# Altium PCB fat32 (2).PcbDoc
Units mm, origin at the board's own origin, x right, y up, seen from the top; angles counter-clockwise.
Board outline 354.7 x 156.7 mm, 2 copper layers (Top Layer, Bottom Layer); 46 components, 482 nets, 145 pads, 64 vias.
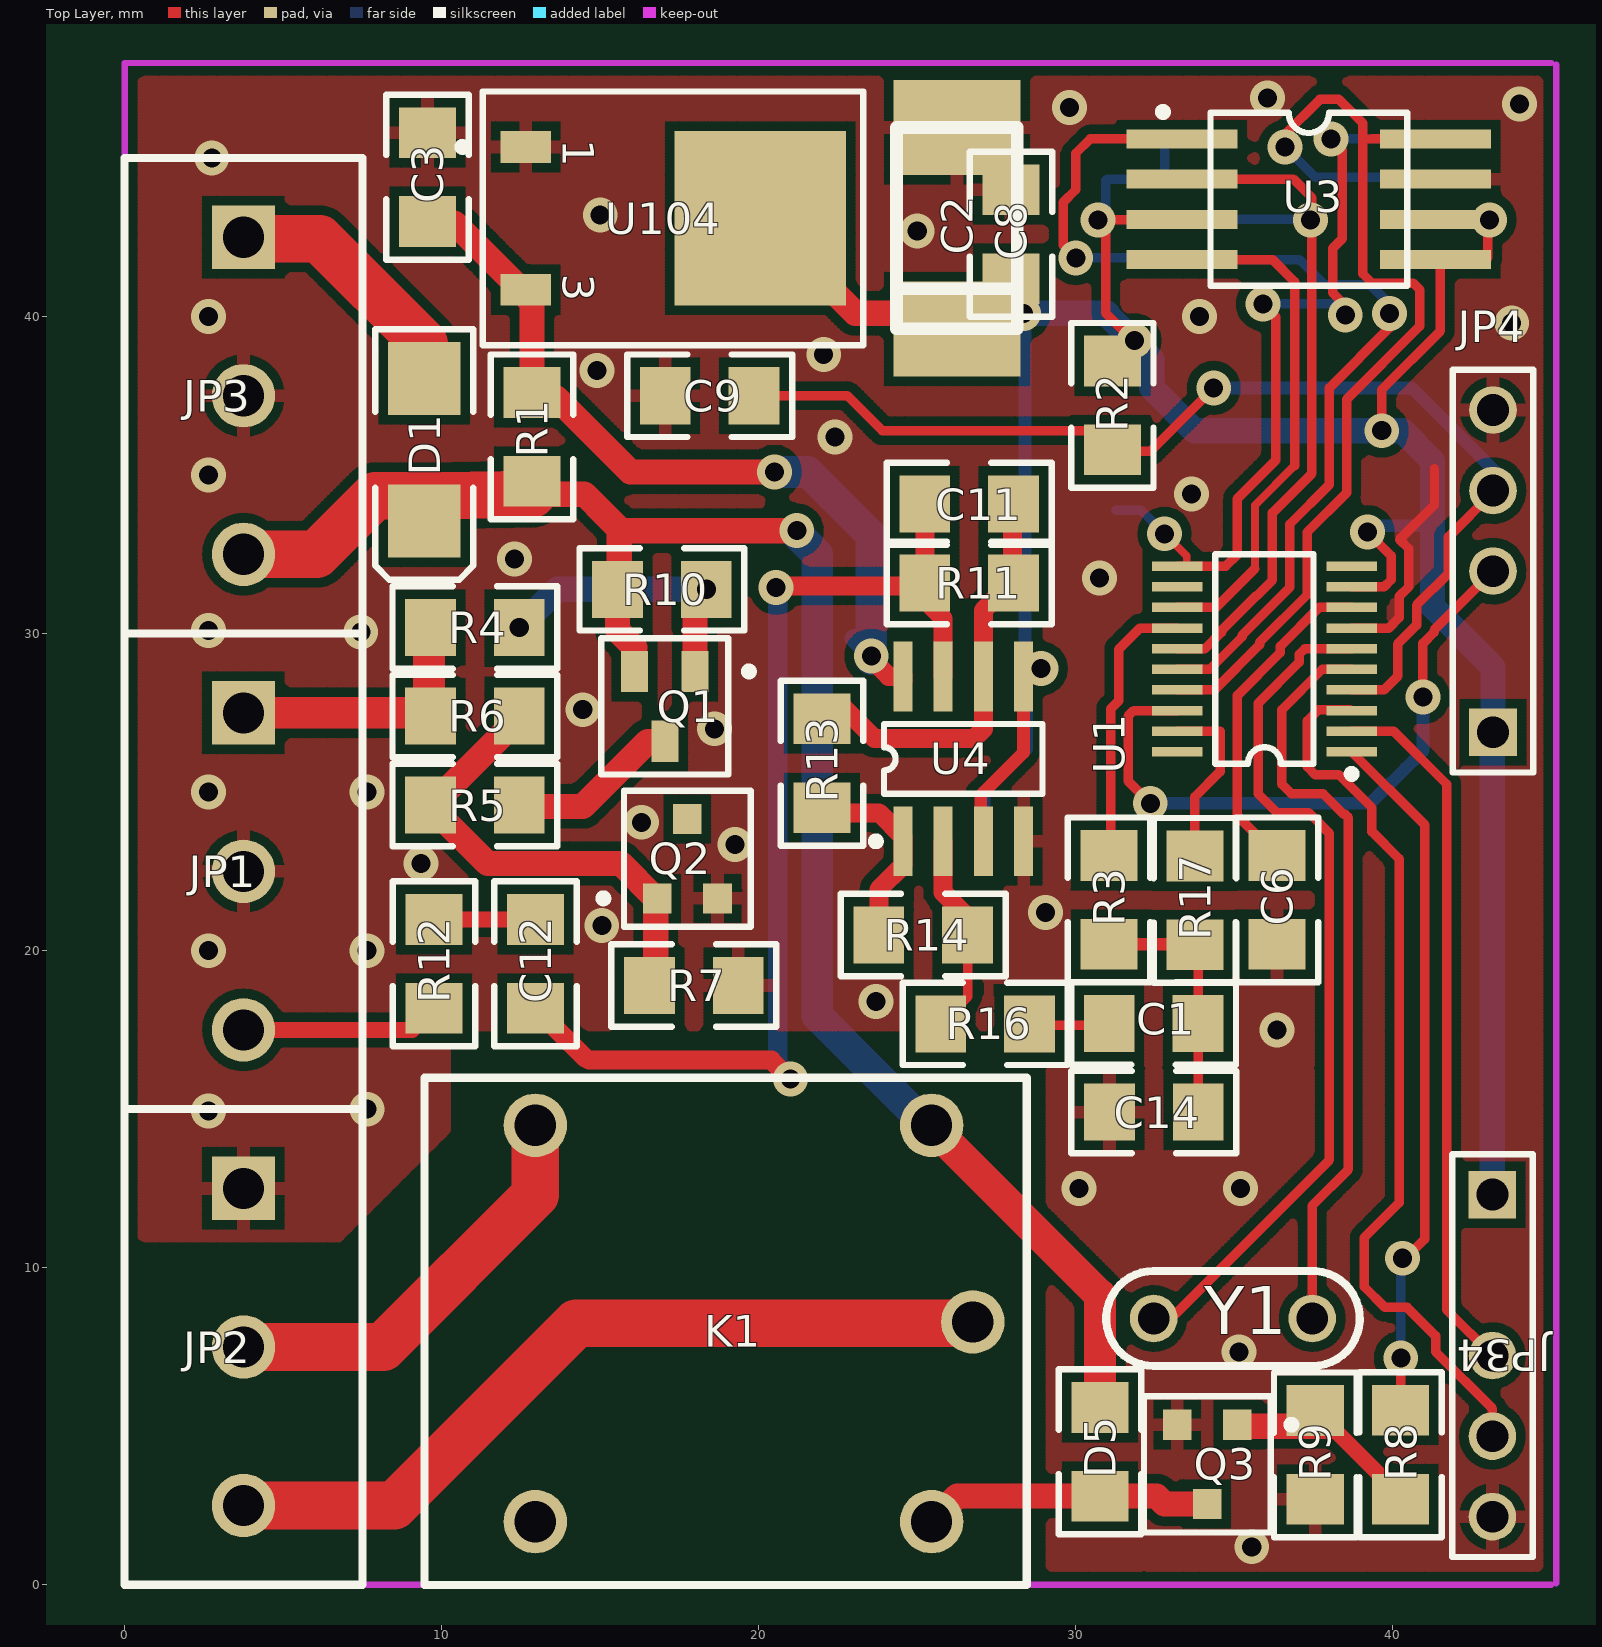
[diagram p0: Top Layer view]
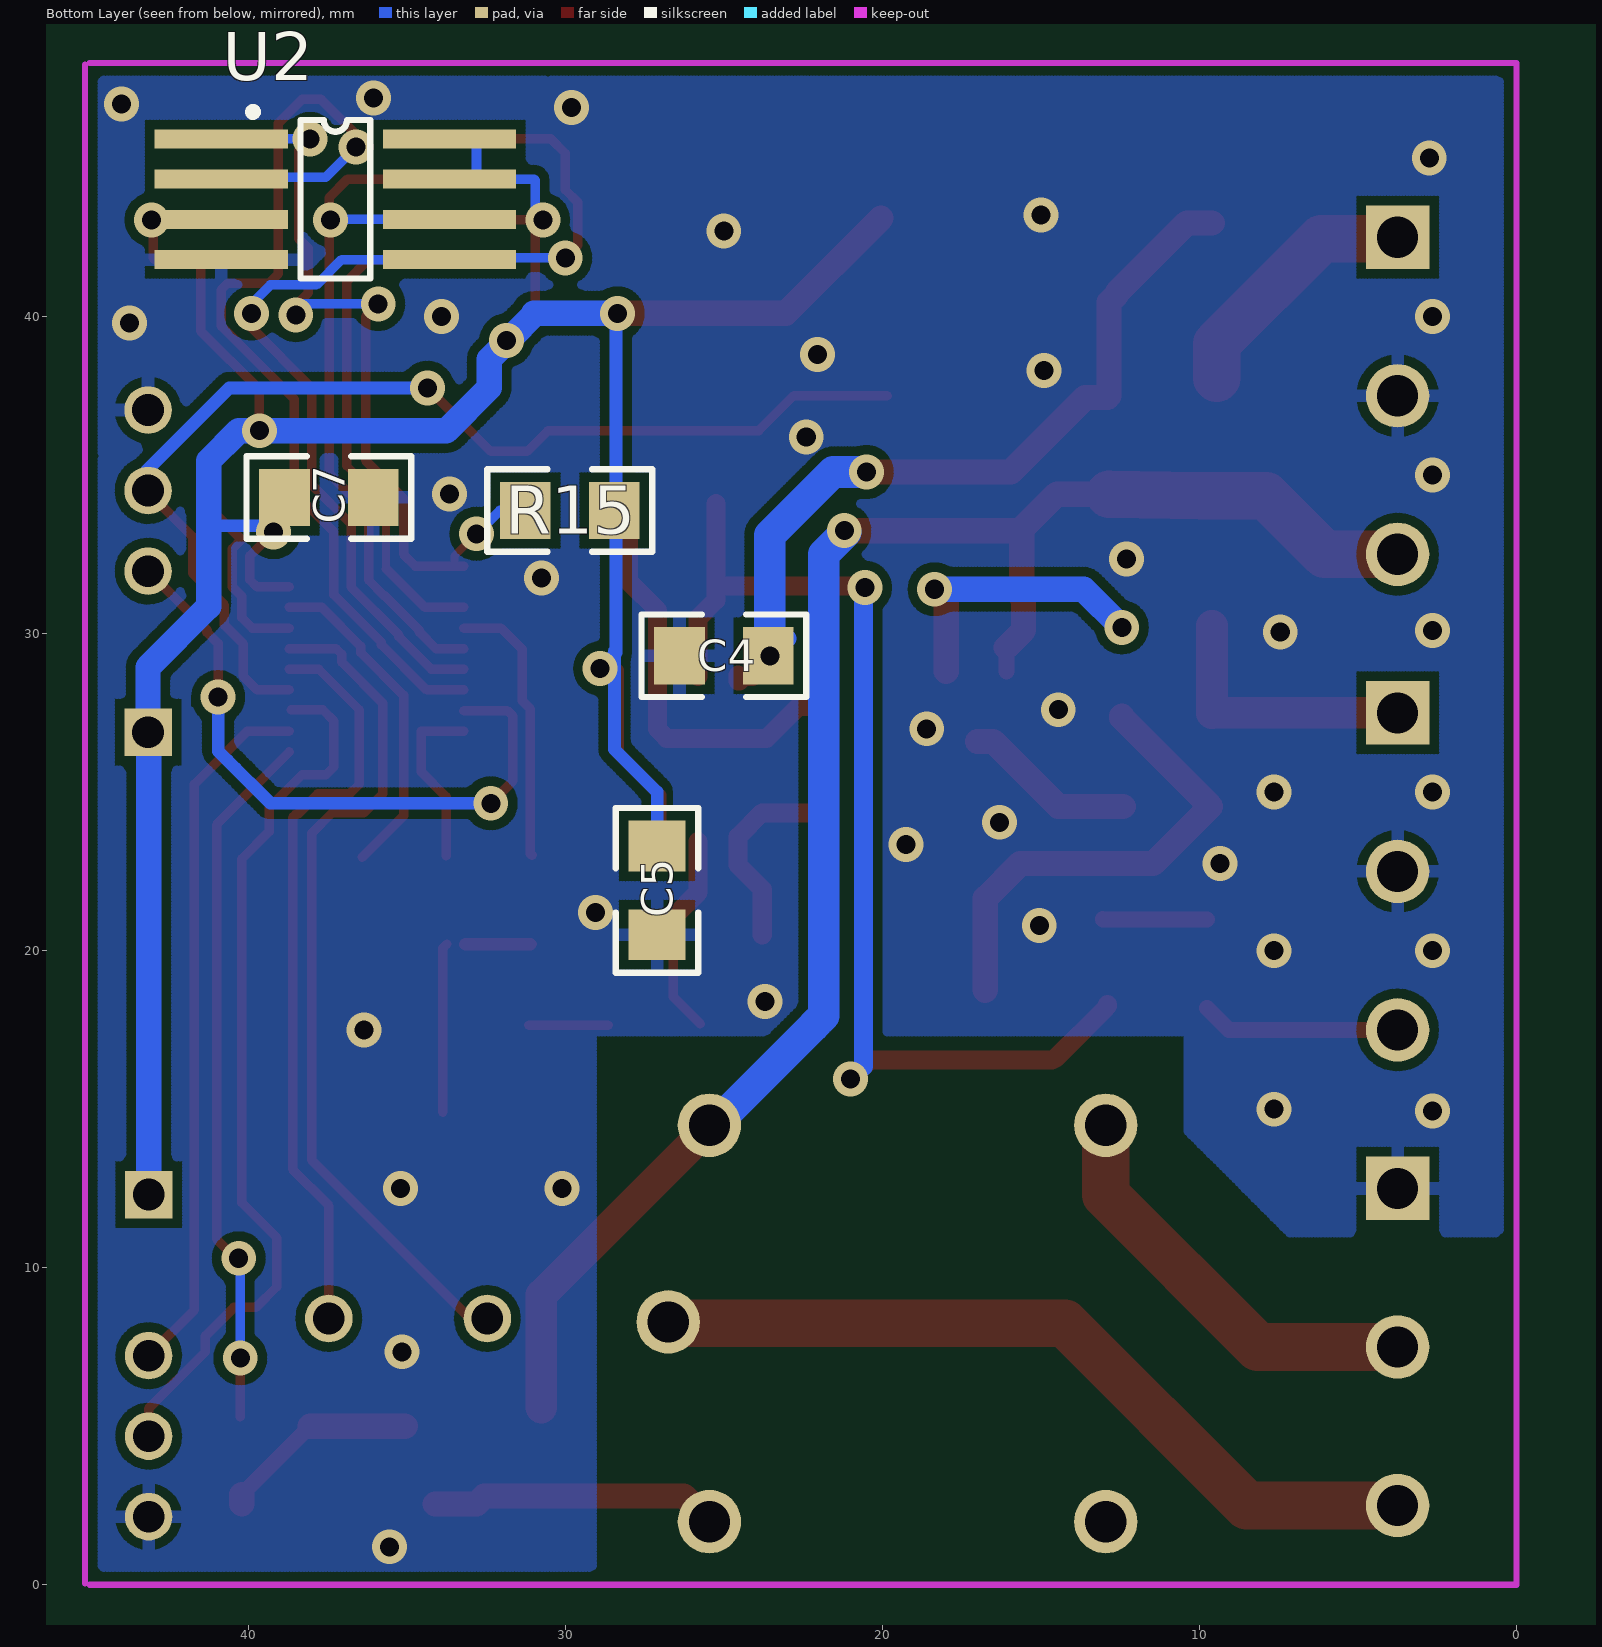
[diagram p1: Bottom Layer view, seen from below]

## Layer stack, top to bottom
Top Layer: signal copper 0.0356
Dielectric: dielectric 0.32, FR-4, Dk 4.8
Bottom Layer: signal copper 0.0356

## Board outline
-33.3,143.2 -33.3,-13.5 320.7,-13.5 320.7,139.05 -33.65,139.05 -33.65,-13.5 -34,-13.5

## Design rules (kind name [scope] priority, off if disabled: settings)
Clearance Keep_Out [OnLayer('Keep-Out Layer')] p1: gap=0.3
Clearance Poly [InPoly] p2: gap=0.3
Clearance [All] p3: gap=0.25
ComponentClearance [All] p1: gap=0.254 collisioncheckmode=0
HoleSize [All] p1: absolutevalues=TRUE maxlimit=5 minlimit=0.025 maxpercent=80.000 minpercent=20.000
PolygonConnect [All] p1: connectstyle=Relief reliefconductorwidth=0.4 reliefentries=4 polygonreliefangle="90 Angle"
RoutingLayers [All] p1: top layer=Horizontal bottom layer=Vertical
RoutingVias [All] p1: holewidth=0.6 width=1.1 viastyle="Through Hole" minholewidth=0.6 minwidth=1.1 maxholewidth=0.7 maxwidth=1.2
SolderMaskExpansion [All] p1: expansion=0.102
TestPointUsage [All] p1: valid=0 allowmultiple=FALSE
Testpoint [All] p1: side=15 testpointundercomponent=TRUE minsize=1.016 maxsize=2.54 preferedsize=1.524 minholesize=0 maxholesize=1.016 preferedholesize=0.813 testpointgrid=0.025 style=1023 order=1234567890
Width [All] p1: maxlimit=2 minlimit=0.2 preferedwidth=0.254 toplayer_prefwidth=0.25 bottomlayer_prefwidth=0.3 minimp=50.000000 maximp=50.000000 favimp=50.000000
15 further rules are at their usual default settings.

## Components (designator, comment, footprint, x,y, rotation, side; value= is the part's Value field where it differs from the comment)
C1 "1.0" _1206#1 32.45,17.7 r0 top
C2 "22.0x50" CAP_EL_6_3 26.25,39.6 r90 top
C3 "1.0" _1206#1 9.55,44.4 r270 top
C4 "1.0" _1206#1 25,29.3 r180 bottom
C5 "1.0" _1206#1 27.1,21.9 r90 bottom
C6 "1.0" _1206#1 36.35,21.6 r90 top
C7 "1.0" _1206#1 37.45,34.3 r0 bottom
C8 "1.0" _1206#1 27.95,42.6 r270 top
C9 "1.0" _1206#1 18.45,37.5 r0 top
C11 "1n0" _1206#2 26.65,34.1 r0 top
C12 "1.0" _1206#2 12.95,19.6 r90 top
C14 "0.1" _1206#2 32.45,14.9 r180 top
D1 "10BQ100" DSO-C2/X2.3 9.45,35.8 r270 top
D5 "BAV103" _1206d 30.75,4.2 r270 top
JP1 "Header 3" BT5-3 3.75,27.5 r270 top
JP2 "Header 3" BT5-3 3.75,12.5 r270 top
JP3 "Header 3" BT5-3 3.75,42.5 r270 top
JP4 "SWIM_CONN" HDR1X5_uart 43.15,26.9 r90 top
JP34 "UART_PORT" HDR1X5_uart 43.15,12.3 r270 top
K1 "BS115" BS115 25.45,2 r90 top
Q1 "BC856" SO-G3 17.05,27.7 r180 top
Q2 "BC847" SO-G3/C2.5 17.75,22.9 r0 top
Q3 "BC847" SO-G3/C2.5 34.15,3.8 r180 top
R1 "Res2" _1206#1 12.85,36.2 r90 top
R2 "1K0" _1206#1 31.15,37.2 r270 top
R3 "1K0" _1206#1 31.05,21.6 r90 top
R4 "1K0" _1206#1 11.05,30.2 r180 top
R5 "1K0" _1206#1 11.05,24.6 r180 top
R6 "1K0" _1206#1 11.05,27.4 r180 top
R7 "10K" _1206#1 17.95,18.9 r0 top
R8 "3K0" _1206#1 40.25,4.1 r90 top
R9 "10K" _1206#1 37.55,4.1 r270 top
R10 "10K" _1206#1 16.95,31.4 r180 top
R11 "33K" _1206#2 26.65,31.6 r0 top
R12 "1K0" _1206#2 9.75,19.6 r90 top
R13 "10K" _1206#2 22,25.9 r270 top
R14 "1K0" _1206#2 25.2,20.5 r0 top
R15 "1K0" _1206#3 29.85,33.9 r180 bottom
R16 "10K" _1206#2 27.15,17.7 r0 top
R17 "1K0" _1206#2 33.75,21.6 r90 top
U1 "STM8S103F" TSSO6x6-G20/Y1.6 35.95,29.2 r90 top (schematic designator U?)
U2 "M25P10" SO-G8#1 37.25,43.7 r270 bottom
U3 "AT45DB161D-SU" AT45W 37.35,43.7 r270 top
U4 "LM358M" SO-G8#2 26.45,26.05 r0 top
U104 "REG1117-3.3" SIP-G3/C7.4 16.35,43.1 r270 top
Y1 "10MGz" QWARZ1 32.45,8.4 r0 top

## Footprints (in the part's own frame and the unit in brackets; to place one, negate y for a bottom-side part, rotate by r counter-clockwise, add the part's x,y. Pads: shape width x height; smd on the part's side, far side on the other; paste and mask are expansions set on the pad)
_1206#1 [mm]
  rect 1.6x1.8 smd: 1(-1.397,0.003) 2(1.403,0.003)
  silkscreen extent -2.6,-1.3 2.6,1.3
_1206#2 [mm]
  rect 1.6x1.8 smd: 1(-1.412,-0.007) 2(1.388,-0.007)
  silkscreen extent -2.61,-1.31 2.59,1.29
_1206#3 [mm]
  rect 1.6x1.8 smd: 1(-1.409,-0.014) 2(1.391,-0.014)
  silkscreen extent -2.61,-1.31 2.59,1.29
_1206d [mm]
  rect 1.6x1.8 smd: 1(1.405,0.012) 2(-1.395,0.012)
  silkscreen extent -2.6,-1.29 2.6,1.31
AT45W [mm]
  rect 0.6x3.5 smd: 1(-1.905,-4) 2(-0.635,-4) 3(0.635,-4) 4(1.905,-4) 5(1.905,4) 6(0.635,4) 7(-0.635,4) 8(-1.905,4)
  silkscreen extent -2.88,-4.72 2.73,3.1
BS115 [mm]
  round 2 hole 1.3: 1(6.292,-1.304) 2(-0.008,12.496) 3(12.492,12.496) 4(-0.008,-0.004) 5(12.492,-0.004)
  silkscreen extent -2.01,-3 13.99,16
BT5-3 [mm]
  round 2 on Top Overlay: 0(-0.001,-4.001)
  rect 2x2 hole 1.3: 1(-0.001,-0.001)
  round 2 hole 1.3: 2(4.999,-0.001) 3(9.999,-0.001)
  silkscreen extent -2.5,-3.75 12.5,3.75
CAP_EL_6_3 [mm]
  rect 3x4 smd: 1(0.011,-0.002) 2(6.361,-0.002)
  silkscreen extent 0.01,-1.91 6.36,1.9
DSO-C2/X2.3 [mm]
  rect 2.3x2.3 smd: 1(-2.25,0) 2(2.25,0)
  silkscreen extent -3.8,-1.55 4.1,1.55
HDR1X5_uart [mm]
  rect 1.5x1.5 hole 1: 1(-0.008,-0.009)
  round 1.5 hole 1: 3(5.072,-0.009) 4(7.612,-0.009) 5(10.152,-0.009)
  silkscreen extent -1.28,-1.28 11.42,1.26
QWARZ1 [mm]
  round 1.5 hole 1: 1(0.008,0) 2(5.008,0)
  silkscreen extent -1.49,-1.5 6.51,1.5
SIP-G3/C7.4 [mm]
  rect 1x1.6 smd: 1(-2.25,-3.7) 3(2.25,-3.7)
  rect 5.5x5.4 smd: 4(0,3.7)
  silkscreen extent -4,-5.82 4,6.95
SO-G3 [mm]
  rect 0.85x1.3 smd: 1(-0.938,-1.106) 2(0.962,-1.106) 3(0.012,1.094)
  silkscreen extent -2.76,-2.16 2.01,2.14
SO-G3/C2.5 [mm]
  rect 0.9x0.95 smd: 1(-0.95,-1.25) 2(0.95,-1.25) 3(0,1.25)
  silkscreen extent -2.77,-2.15 2,2.15
SO-G8#1 [mm]
  rect 0.6x4.2 smd: 1(-1.905,-3.6) 2(-0.635,-3.6) 3(0.635,-3.6) 4(1.905,-3.6) 5(1.905,3.6) 6(0.635,3.6) 7(-0.635,3.6) 8(-1.905,3.6)
  silkscreen extent -2.88,-2.72 2.5,1.1
SO-G8#2 [mm]
  rect 0.6x2.2 smd: 1(-1.905,-2.6) 2(-0.635,-2.6) 3(0.635,-2.6) 4(1.905,-2.6) 5(1.905,2.6) 6(0.635,2.6) 7(-0.635,2.6) 8(-1.905,2.6)
  silkscreen extent -2.88,-2.72 2.5,1.1
TSSO6x6-G20/Y1.6 [mm]
  rect 0.3x1.6 smd: 1(-2.925,-2.75) 2(-2.275,-2.75) 3(-1.625,-2.75) 4(-0.975,-2.75) 5(-0.325,-2.75) 6(0.325,-2.75) 7(0.975,-2.75) 8(1.625,-2.75) 9(2.275,-2.75) 10(2.925,-2.75) 11(2.925,2.75) 12(2.275,2.75) 13(1.625,2.75) 14(0.975,2.75) 15(0.325,2.75) 16(-0.325,2.75) 17(-0.975,2.75) 18(-1.625,2.75) 19(-2.275,2.75) 20(-2.925,2.75)
  silkscreen extent -3.75,-2.87 3.3,1.55

## Part data
C1 C3 C4 C5 C6 C7 C8 C9 C11 C12 C14: library part "Cap Semi", "Capacitor (Semiconductor SIM Model)"
C2: library part "Cap Pol1", "Polarized Capacitor (Radial)"
D1 D5: library part 10BQ015, "Schottky Rectifier"
JP1 JP2 JP3: "Header, 3-Pin"
JP34: "Header, 5-Pin"
K1: "Single-Pole Dual-Throw Relay"
Q1: library part GT109
Q2 Q3: library part BC847ALT1, "General Purpose Transistor NPN Silicon"
R1: "Resistor"
R2 R3 R4 R5 R6 R7 R8 R9 R11 R12 R13 R14 R15 R16 R17: library part Res2, "Resistor"
R10: library part RES, "Resistor"
U4: "Low-Power Dual Operational Amplifier"
U104: "800mA and 1A Low Dropout Positive Regulator 2.85V, 3.3V, 5V, and Adjustable"
Y1: library part XTAL, "Crystal Oscillator"

## Via types
v1: diameter 1.1, hole 0.6, Top Layer to Bottom Layer, 64 vias

## Nets (pads, with @x,y where several pads share a name; then routed paths per layer and width w, separated by ;. In a path a pad name is that pad's centre, name@x,y a point inside that pad or via, vN(x,y) a via of type N, cw(c..) or ccw(c..) an arc to the next point about the centre after c; other vN are vias at no path point)
+3.3V: 
+3V3: C2.1 C5.2 C7.2 C8.2 JP4.1 JP34.1 R2.1 R15.2 U1.9 U2.3 U2.7 U2.8 U3.3 U3.5 U3.6 U4.3 U4.5 U104.4 | length 106.9
  Top Layer w0.3: v1@30.95,43 v1@30.95,42.95 ; v1@31,43 v1@30.95,42.95 ; v1@31,43.05 U3.3@33.3,43.05 ; v1(31.85,39.25) 31.8,39.25 30.95,40.1 v1@30.95,42.95 ; U1.9 39.725,31.475 39.95,31.7 39.95,32.45 v1(39.2,33.2) ; v1(39.65,36.4) 39.65,37.7 41.5,39.55 41.5,41.795 U3.5@41.5,41.85 ; U3.5@41.55,41.8 42.95,41.8 43,41.85 U3.6@43,43.05
  Top Layer w0.4: U4.3@27,23.3 27,23.45 27,24.9 28.35,26.25 28.35,28.65 28.35,28.85 28.355,28.85 28.85,28.85 v1(28.9,28.9)
  Top Layer w0.8: U104.4 23.05,40.1 26.252,40.1 27.953,40.1 v1(28.35,40.1)
  Bottom Layer w0.3: v1(30.7,43.05) 30.95,43.3 30.95,44.3 30.985,44.335 U2.7@32.865,44.335 ; U2.7@32.3,44.3 U2.7@33.25,44.3 ; U2.7@34.585,44.315 34.6,44.315 34.615,44.3 34.65,44.335 U2.7 U2.7@32.865,44.335 ; U2.8@34.65,45.605 U2.8 32.855,45.605 32.8,45.55 32.8,44.4 U2.7@32.865,44.335 ; U2.3@39.85,43.065 U2.3 43.035,43.065 v1(43.05,43.05)
  Bottom Layer w0.4: C5.2 27.103,25.003 28.45,26.35 28.45,28.9 28.45,29.35 ; v1(28.35,40.1) 28.376,40.074 28.4,40.05 28.4,33.886 28.4,29.4 28.45,29.35 ; 28.45,29.45 28.45,29.35 ; v1(28.9,28.9) 28.45,29.35 ; v1@31.75,39.3 v1@31.75,39.35 ; v1(39.2,33.2) 39.4,33.4 41.25,33.4
  Bottom Layer w0.8: v1(28.35,40.1) 30.95,40.1 ; 31,40.1 30.95,40.1 ; JP34.1 43.141,26.873 JP4.1 43.159,28.941 41.25,30.85 41.25,33.4 41.25,35.45 40.3,36.4 v1(39.65,36.4) 33.75,36.4 32.4,37.75 32.4,38.65 31.825,39.225 31.75,39.3 30.95,40.1
+3V_: 
+5V: 
+5V: 
+5V_IZ: 
+12V: D1.2 D5.2 JP3.3 K1.5 Q1.2 R1.1 R10.2 | length 56.8
  Top Layer w0.5: R10.2 15.6,31.45 R10.2@15.7,31.55 ; Q1.2 16.088,29.562
  Top Layer w0.8: R1.1@12.85,34.4 14.5,34.4 15.6,33.3 15.6,31.45 15.6,31.397 R10.2@15.6,31.15 ; 14.85,34.05 15.65,33.25 v1(21.2,33.25) ; R10.2 15.547,30.103 16.088,29.562
  Top Layer w1: K1.5@25.45,14.45 30.762,9.138 D5.2
  Top Layer w1.5: JP3.3 6.051,32.501 7.9,34.35 9.45,34.35 9.95,34.35 R1.1@12.85,34.4
  Bottom Layer w1: v1(21.2,33.25) 21.15,33.2 21.85,32.5 21.85,17.95 22.173,17.627 ; 22.05,17.75 25.381,14.419 K1.5@25.4,14.4
+12VI: C3.2 C4.2 R1.2 U4.8 U104.3 | length 26
  Top Layer w0.6: v1(23.55,29.3) 23.55,29.2 24.1,28.65 U4.8 ; U4.8@24.5,28.5 24.545,28.5 24.55,28.5 24.55,28.65 U4.8@24.55,28.7
  Top Layer w0.8: C3.2@9.6,42.95 10.4,42.95 12.575,40.775 12.6,40.75 12.6,40.7 12.85,40.45 12.85,37.603 R1.2@12.85,37.5 ; R1.2@12.9,37.45 13.6,37.45 15.95,35.1 v1(20.5,35.1)
  Bottom Layer w0.6: C4.2@23,29.85 v1(23.55,29.3)
  Bottom Layer w1: v1(20.5,35.1) 21.55,35.1 23.55,33.1 23.55,29.303 v1(23.55,29.3) C4.2@23.55,29.2
+IAKB1: 
+IAKB2: 
+UOUT: 
-5V: 
-5V_IZ: 
-IAKB1: 
-IAKB2: 
-UOUT: 
BAT: 
C0: Q2.3
CAN: 
CS0: U1.13 U3.4 | length 16.4
  Top Layer w0.25: 35.65,32.05 35.65,34.05 36.9,35.3
  Top Layer w0.3: U1.13 34.425,30.825 35.65,32.05 ; U3.4 36.205,41.795 36.9,41.1 36.9,35.3
CS1: R15.1 U1.11 U2.1 | length 24.2
  Top Layer w0.25: v1(32.8,33.15) 33.5,32.45 U1.11@33.5,32.125
  Top Layer w0.3: U1.11 33.5,32.125 34.725,32.125 35.1,32.5 35.1,34.261 36.3,35.461 36.3,36 ; v1(35.9,40.4) 36.3,40 36.3,35.5 ; v1(38.05,45.6) 38.4,45.25 38.4,42.45 38.1,42.15 38.1,40.75 v1@38.45,40.4
  Bottom Layer w0.3: R15.1 32.064,33.886 v1(32.8,33.15) ; v1(35.9,40.4) v1@38.45,40.4 ; v1(38.05,45.6) 38.2,45.6 38.205,45.605 U2.1@39.85,45.605
  other v1: 38.5,40.05
D4: R8.2 U1.1 | length 22.3
  Top Layer w0.3: U1.1 41,23.975 41,10.9 40.4,10.3 v1(40.3,10.3) ; R8.2@40.25,5.3 40.25,5.503 v1(40.25,7.15)
  Bottom Layer w0.3: v1(40.25,7.15) 40.25,10.25 v1(40.3,10.3)
D7: 
D7: 
DT1: 
DT1: 
DT2: 
DT3: 
DT4: 
DT5: 
GND: C2.2 C3.1 C4.1 C5.1 C6.1 C7.1 C8.1 C9.1 C14.2 JP1.2 JP2.1 JP3.2 JP4.5 JP34.5 Q2.2 Q3.2 R7.2 R9.2 U1.7 U2.4 U3.7 U4.4 U104.1 | length 7
  Top Layer w0.3: U1.7 39.875,30.175 40.2,30.5 40.2,31.172 40.5,31.472 40.5,32.678 40.214,32.964 41.3,34.05 41.3,35.193
  other v1: 35.55,1.2 35.15,7.35 30.1,12.5 35.2,12.5 2.65,14.95 7.65,15 36.35,17.5 23.7,18.4 2.65,20 7.65,20 15.05,20.8 29.05,21.2 9.35,22.75 19.25,23.35 16.3,24.05 2.65,25 7.65,25 18.6,27 14.45,27.6 7.45,30.05 2.65,30.1 30.75,31.75 12.3,32.35 33.65,34.4 2.65,35 22.4,36.2 14.9,38.3 22.05,38.8 43.75,39.8 2.65,40 33.9,40 25,42.7 15,43.2 2.75,45 29.8,46.6 44,46.7 36.05,46.9
I1: 
MISO: U1.17 U2.2 U3.8 | length 35.2
  Top Layer w0.3: U1.17 34.375,28.225 35.8,29.65 35.8,29.728 37.3,31.228 37.3,33.2 38.55,34.45 38.55,37.4 40.85,39.7 40.85,40.85 40.65,41.05 39.35,41.05 39.05,41.35 39.05,45.6 ; v1(36.6,45.35) 36.6,45.75 37.7,46.85 38.3,46.85 39.05,46.1 39.05,45.6 ; U3.8@41.8,45.605 41.8,45.6 41.795,45.605 U3.8 39.355,45.605 39.05,45.6
  Bottom Layer w0.3: v1(36.6,45.35) 37.558,44.392 40.792,44.392 40.735,44.335 U2.2@39.85,44.335
MOSI: U1.16 U2.5 U3.1 | length 32.6
  Top Layer w0.3: v1@30,41.8 v1(30,41.85) 29.6,42.25 29.6,43.6 30,44 30,45.15 30.455,45.605 U3.1 ; U1.16 34.225,28.875 35.25,29.9 35.25,29.956 36.75,31.456 36.75,33.45 38,34.7 38,37.75 39.9,39.65 v1(39.9,40.1)
  Bottom Layer w0.3: v1(30,41.85) 33.65,41.85 34.55,41.85 34.605,41.795 37.055,41.795 37.85,41 39.3,41 39.9,40.4 v1(39.9,40.1)
NetA1_1: 
NetA1_1: 
NetA1_2: 
NetA1_2: 
NetA1_2: 
NetA1_2: 
NetA1_2: 
NetA1_2: 
NetA1_2: 
NetBT1_1: 
NetBT2_1: 
NetBT2_2: 
NetC1_1: C1.1 R16.2 | length 2.5
  Top Layer w0.3: R16.2@28.65,17.65 31.053,17.65 C1.1@31.15,17.65
NetC1_2: C1.2 C14.1 R3.1 R17.1 | length 7.5
  Top Layer w0.3: R3.1 R3.1@31.1,20.203 ; R17.1@33.741,20.203 R17.1 33.862,20.082 33.862,17.703 C14.1
  Top Layer w0.4: R3.1@31.1,20.203 33.144,20.203 33.147,20.2 R17.1@33.15,20.203
NetC2_2: 
NetC3_1: 
NetC6_2: C6.2 U1.8 | length 12.1
  Top Layer w0.3: 35.25,24.1 C6.2 ; C6.2@36.4,22.95 C6.2 ; U1.8 37.675,30.825 36.45,29.6 36.45,29.4 35.1,28.05 35.1,24.25 C6.2
NetC8_1: 
NetC11_1: 
NetC11_1: C11.1 C12.1 R11.1 U4.7 | length 35.1
  Top Layer w0.6: C12.1@12.9,18.3 12.9,18.25 12.959,18.191 14.55,16.6 ; 14.65,16.55 20.4,16.55 v1(21,15.95) ; v1(20.55,31.45) 20.6,31.5 25.238,31.5 R11.1@25.25,31.5 ; R11.1@25.238,31.7 R11.1@25.25,31.7 ; C11.1@25.25,34.1 25.25,34.093 R11.1@25.25,31.7 ; U4.7 25.815,30.485 25.25,31.05 R11.1@25.25,31.5 ; R11.1@25.25,31.5 25.25,31.593 R11.1@25.25,31.7
  Bottom Layer w0.6: v1(20.55,31.45) 20.6,31.4 20.6,16.35 v1(21,15.95)
NetC11_2: C11.2 R11.2 R13.1 U4.6 | length 13.1
  Top Layer w0.6: R13.1@21.95,27.7 21.993,27.7 22.65,27.7 23.65,26.7 26.8,26.7 27.085,26.985 U4.6 27.085,30.735 27.991,31.641 28,31.65 C11.2@28,34
NetC12_1: 
NetC12_2: C12.2 R12.2 | length 3.3
  Top Layer w0.5: R12.2 C12.2 13.038,20.988 13.05,21 C12.2@13.05,20.988
NetC14_2: 
NetC21_2: 
NetC22_1: 
NetC22_2: 
NetC23_1: 
NetC30_2: 
NetC30_2: 
NetC31_2: 
NetC36_1: 
NetC45_1: 
NetC45_2: 
NetC46_1: 
NetC46_2: 
NetC47_2: 
NetC48_1: 
NetC48_2: 
NetC49_1: 
NetC50_2: 
NetC51_2: 
NetC52_2: 
NetC53_2: 
NetC61_1: 
NetC61_2: 
NetC62_2: 
NetC63_2: 
NetC66_1: 
NetC500_2: 
NetC502_1: 
NetC502_2: 
NetC505_1: 
NetC505_2: 
NetC508_1: 
NetC510_1: 
NetC511_1: 
NetC511_2: 
NetC512_2: 
NetC512_2: 
NetC512_2: 
NetC513_2: 
NetC514_1: 
NetC516_1: 
NetC516_2: 
NetC517_1: 
NetC517_1: 
NetC517_1: 
NetC600_1: 
NetC600_2: 
NetD1_1: D1.1 JP3.1 | length 8.2
  Top Layer w1.5: JP3.1@3.75,42.45 6.15,42.45 9.45,39.15 D1.1
NetD2_4: 
NetD2_5: 
NetD3_1: 
NetD4_2: 
NetD5_1: D5.1 K1.4 Q3.3 | length 9.1
  Top Layer w0.8: K1.4 26.262,2.8 30.762,2.8 32.55,2.8 32.8,2.55 Q3.3@34.1,2.55
NetD5_1: 
NetD5_1: 
NetD6_2: 
NetD6_2: 
NetD6_2: 
NetD6_2: 
NetD20_2: 
NetD500_1: 
NetD500_2: 
NetD501_1: 
NetD503_1: 
NetD505_1: 
NetD505_1: 
NetD505_2: 
NetD506_1: 
NetD506_1: 
NetFU500_1: 
NetJ1_2: 
NetJ1_2: 
NetJ1_2: 
NetJ1_3: 
NetJ1_3: 
NetJ1_3: 
NetJ1_4: 
NetJ1_4: 
NetJ1_7: 
NetJ1_7: 
NetJ2_1: 
NetJ4_1: 
NetJ4_2: 
NetJ600_1: 
NetJP1_1: JP2.2 K1.3 | length 13.4
  Top Layer w1.5: JP2.2 8.151,7.501 12.954,12.304 K1.3 12.95,14.496 K1.3@12.95,14.5
NetJP1_1: 
NetJP1_2: 
NetJP1_3: JP1.3 R12.1 | length 6.3
  Top Layer w0.5: JP1.3 9.07,17.501 R12.1
NetJP1_7: 
NetJP1_10: 
NetJP2_2: JP1.1 R4.2 R6.2 | length 8.6
  Top Layer w1: JP1.1 9.599,27.501 9.6,27.5 9.6,30.197 R4.2@9.6,30.25
NetJP2_3: JP2.3 K1.1 | length 25.4
  Top Layer w1.5: JP2.3 8.501,2.501 14.25,8.25 K1.1@26.75,8.25
NetJP3_2: 
NetJP3_2: 
NetJP3_2: 
NetJP3_3: 
NetJP3_3: 
NetJP3_3: 
NetJP3_3: 
NetJP3_4: 
NetJP3_4: 
NetJP3_5: 
NetJP3_5: 
NetJP3_7: 
NetJP3_9: 
NetJP4_8: 
NetJP4_9: 
NetJP4_10: 
NetJP5_2: 
NetJP5_5: 
NetJP5_6: 
NetJP5_7: 
NetJP5_9: 
NetJP5_10: 
NetJP5_11: 
NetJP5_12: 
NetJP5_13: 
NetJP5_14: 
NetJP5_15: 
NetJP5_16: 
NetJP5_17: 
NetJP5_18: 
NetJP5_19: 
NetJP5_20: 
NetJP6_17: 
NetJP7_2: 
NetJP7_5: 
NetJP8_3: 
NetJP8_4: 
NetJP8_5: 
NetJP8_6: 
NetJP100_2: 
NetJP101_1: 
NetJP101_2: 
NetJP101_3: 
NetJP101_4: 
NetJP101_5: 
NetJP101_6: 
NetQ1_1: Q1.1 R4.1 R10.1 | length 9.2
  Top Layer w0.8: Q1.1 17.988,31.088 18.322,31.422 18.325,31.425 R10.1@18.35,31.45
  Bottom Layer w0.8: v1(12.447,30.197) 13.65,31.4 v1(18.35,31.4)
NetQ1_1: 
NetQ1_1: 
NetQ1_2: 
NetQ1_3: Q1.3 R5.1 | length 5.4
  Top Layer w0.8: R5.1@12.4,24.55 12.447,24.55 14.45,24.55 16.5,26.6 Q1.3@17,26.6
NetQ2_1: Q2.1 R5.2 R6.1 R7.1 | length 15.2
  Top Layer w0.8: R6.1 12.447,27.347 9.672,24.572 9.65,24.55 11.45,22.75 15.65,22.75 16.75,21.65 16.75,18.903 R7.1@16.75,18.75
NetQ2_3: 
NetQ3_1: Q3.1 R8.1 R9.1 | length 6.3
  Top Layer w0.5: R9.1@38.05,5 R8.1@40.2,2.85
  Top Layer w0.8: Q3.1@35.05,5 35.1,5 37.553,5 R9.1@38.05,5 ; R8.1@40.2,2.55 40.2,2.703 R8.1@40.2,2.85
NetQ4_1: 
NetQ4_3: 
NetQ4_3: 
NetQ5_1: 
NetQ6_1: 
NetQ6_1: 
NetQ7_2: 
NetQ7_2: 
NetQ7_4: 
NetQ7_4: 
NetQ8_2: 
NetQ8_4: 
NetQ9_2: 
NetQ9_4: 
NetQ10_1: 
NetQ10_1: 
NetQ10_3: 
NetQ10_3: 
NetQ11_1: 
NetQ11_1: 
NetQ11_3: 
NetQ500_1: 
NetQ501_1: 
NetQ600_1: 
NetQ600_3: 
NetR3_1: 
NetR3_2: 
NetR3_2: 
NetR3_2: 
NetR3_2: 
NetR4_1: 
NetR4_2: 
NetR5_1: 
NetR6_1: 
NetR7_1: 
NetR7_2: 
NetR8_1: 
NetR8_1: 
NetR8_2: 
NetR8_2: 
NetR13_2: R13.2 R14.1 U4.1 | length 6.1
  Top Layer w0.6: R13.2@22.2,24.35 23.8,24.35 24.55,23.6 24.55,23.45 24.55,22.7 23.788,21.938 R14.1
NetR14_2: R14.2 R16.1 U4.2 | length 7.1
  Top Layer w0.3: R16.1 26.588,18.543 R14.2
  Top Layer w0.4: R14.2 R14.2@27.05,20.031
  Top Layer w0.6: U4.2 25.815,21.835 26.55,21.1 R14.2@26.55,20.493
NetR22_2: 
NetR22_2: 
NetR22_2: 
NetR22_2: 
NetR22_2: 
NetR22_2: 
NetR22_2: 
NetR22_2: 
NetR22_2: 
NetR25_1: 
NetR30_2: 
NetR38_1: 
NetR42_1: 
NetR42_2: 
NetR43_1: 
NetR43_2: 
NetR43_2: 
NetR44_1: 
NetR44_2: 
NetR44_2: 
NetR45_2: 
NetR49_1: 
NetR49_2: 
NetR51_1: 
NetR51_2: 
NetR52_1: 
NetR53_1: 
NetR57_1: 
NetR60_1: 
NetR69_2: 
NetR83_2: 
NetR90_2: 
NetR91_1: 
NetR93_1: 
NetR95_1: 
NetR96_2: 
NetR504_1: 
NetR505_2: 
NetR505_2: 
NetR510_1: 
NetR600_1: 
NetR600_2: 
NetR603_1: 
NetR603_2: 
NetR605_2: 
NetS2_1: 
NetU1_1: 
NetU1_5: U1.5 Y1.2 | length 23.9
  Top Layer w0.3: Y1.2 37.458,11.958 38.6,13.1 38.6,24.2 38.5,24.3 38.45,24.3 37.8,24.95 36.8,24.95 36.5,25.25 36.5,27.6 37.775,28.875 U1.5
NetU1_6: U1.6 Y1.1 | length 27.3
  Top Layer w0.3: Y1.1 33,8.4 38,13.4 38,23.7 37.35,24.35 36.35,24.35 35.75,24.95 35.75,27.8 37.05,29.1 37.05,29.35 37.225,29.525 U1.6
NetU1_12: U1.12
NetU5_1: 
NetU8_3: 
NetU8_7: 
NetU8_8: 
NetU11_5: 
NetU14_3: 
NetU14_4: 
NetU14_5: 
NetU14_6: 
NetU14_12: 
NetU14_13: 
NetU14_14: 
NetU15_3: 
NetU15_3: 
NetU15_3: 
NetU15_3: 
NetU15_4: 
NetU15_5: 
NetU15_5: 
NetU15_5: 
NetU15_5: 
NetU15_5: 
NetU15_5: 
NetU15_7: 
NetU15_7: 
NetU15_9: 
NetU15_10: 
NetU15_15: 
NetU16_3: 
NetU16_4: 
NetU16_6: 
NetU18_1: 
NetU18_2: 
NetU21_1: 
NetU21_2: 
NetU503_4: 
NetU600_3: 
NetX13_1: 
NetX15_1: 
NetX23_1: 
NetX32_1: 
NetX33_1: 
OFF1: 
OFF2: 
P0_0: 
P0_1: 
P0_2: 
P0_3: 
P0_4: 
P0_5: 
P0_6: 
P0_7: 
P0_8: 
P0_8_: 
P0_8_: 
P0_8_: 
P0_9: 
P0_9_: 
P0_9_: 
P0_9_: 
P0_9_: 
P0_10: 
P0_11: 
P0_12: 
P0_13: 
P0_14: 
P0_15: 
P0_16: 
P0_17: 
P0_18: 
P0_19: 
P0_19: 
P0_20: 
P0_21: 
P0_22: 
P0_22: 
P0_22: 
P0_23: 
P0_24: 
P0_25: 
P0_27: 
P0_28: 
P0_29: 
P0_30: 
P1_16: 
P1_17: 
P1_18: 
P1_19: 
P1_20: 
P1_21: 
P1_21: 
P1_22: 
P1_23: 
P1_24: 
P1_25: 
P1_26: 
P1_27: 
P1_28: 
P1_29: 
P1_30: 
P1_31: 
PB1: 
PB1: 
PB2: 
PB2: 
PB3: 
PB3: 
PE6: 
PE6: 
PE7: 
PQ1: 
PQ2: 
PQ3: 
PQ4: 
PQ5: 
PQ6: 
PROG0: 
PROG1: 
PROG1: 
PROG1: 
PWM: 
PWM0: R17.2 U1.19 | length 5.6
  Top Layer w0.3: U1.19 34.55,26.925 34.55,25.65 33.756,24.856 R17.2
PWM1: R3.2 U1.14 | length 8.8
  Top Layer w0.3: R3.2 31.1,23.056 31.1,27.628 31.35,27.878 31.35,29.5 32.025,30.175 U1.14
PWM2: 
REL1: 
REL1: 
REL2: 
REL3: 
REL4: 
REL5: 
REL6: 
RES: 
RST: C9.2 JP4.4 R2.2 U1.4 | length 35.4
  Top Layer w0.3: C9.2 22.797,37.503 23.9,36.4 30.55,36.4 R2.2 31.2,35.75 32.35,35.75 v1(34.35,37.75) ; U1.4 39.725,28.225 40.15,28.65 40.15,29.672 40.75,30.272 40.75,30.9 41.75,31.9 41.75,33.05 JP4.4@43.15,34.45
  Bottom Layer w0.4: v1(34.35,37.75) 40.6,37.75 43.2,35.15 43.2,34.512 JP4.4@43.2,34.4
RTX: JP34.4 U1.3 | length 28.2
  Top Layer w0.3: U1.3@38.65,27.6 37.65,27.6 37.3,27.25 37.3,25.8 37.55,25.55 38.3,25.55 39.342,24.508 39.342,23.758 40.2,22.9 40.2,12.05 39.1,10.95 39.1,9.4 39.75,8.75 40.45,8.75 41.35,7.85 41.35,7.35 43.141,5.559 JP34.4
RX: 
RXCAN: 
SCK: U1.15 U2.6 U3.2 | length 23.7
  Top Layer w0.3: U1.15 34.075,29.525 34.6,30.05 34.6,30.1 35.7,31.2 ; U3.2 36.865,44.335 37.45,43.75 37.45,43.05 37.45,35.056 36.2,33.806 36.2,31.683 35.708,31.192
  Bottom Layer w0.3: U2.6@34.65,43.065 37.4,43.065 37.485,43.065 v1@37.5,43.05
  other v1: 37.4,43.05
SK1: 
SK2: 
SK3: 
SK4: 
SWIM: JP4.3 U1.18 | length 20.9
  Top Layer w0.3: v1(32.35,24.65) 31.65,25.35 31.65,27.4 31.825,27.575 U1.18 ; v1(40.95,28) 40.95,29.694 41.3,30.044 41.3,30.113 JP4.3
  Bottom Layer w0.4: v1(32.35,24.65) 39.3,24.65 40.65,26 ; 40.4,25.75 40.95,26.3 v1(40.95,28)
T3: 
T3: 
TD1: 
TX: 
U2: 
U5: 
U6: 
U7: 
U8: 
UAKB: 
UB1: 
UB2: 
UBM1: 
UBM2: 
UIB1: 
UIB2: 
ULOAD: 
US: 
US1: 
US1: 
US1: 
US1: 
US1: 
US1: 
US1: 
US1: 
US1: 
UTX: JP34.3 U1.2 | length 22.3
  Top Layer w0.3: U1.2 40.025,26.925 41.7,25.25 41.7,8.668 JP34.3
UU1: 
UU2: 
UU3: 
UU4: 
UU5: 
UU6: 
UU7: 
UU8: 
UU9: 
UU10: 
UU11: 
UU12: 
UU13: 
UU14: 
VREF: 
VS: 
VS: 
pads on no net: JP1.0 JP2.0 JP3.0 K1.2 U1.10 U1.20

## Polygon pours and split planes (outlines as drawn)
GND on Top Layer (hatched 90Degree grid 0.1 track 0.3, remove dead copper): -5.6,49.1 -5.6,10.95 6.75,10.95 10.15,14.35 10.15,17.6 29.2,17.6 29.2,-1 47,-1 47,49.25 -5.6,49.25
GND on Bottom Layer (hatched 90Degree grid 0.1 track 0.3, remove dead copper): -6.6,50.45 52.4,50.45 52.4,-1.55 29.15,-1.55 29.15,17.45 10.35,17.45 10.35,14.3 7.55,11.5 7.15,11.1 -6.5,11.1 -6.5,50.5

## Keep-outs
Keep-Out Layer:
  lines w0.2: 0,47.95 0,0 45,0 ; 0,48 45,48 ; 45.15,0.05 45.15,47.95

## Text inside footprints (layer, text, board x,y; h text height)
U104: Top Overlay "1" at 13.825,45.6 h1 r270; Top Overlay "3" at 13.825,41.357 h1 r270